# Altium PCB Amplifier_2.PcbDoc
Units mil, origin at the board's own origin, x right, y up, seen from the top; angles counter-clockwise.
Board outline 6000 x 4000 mil, 2 copper layers (Top Layer, Bottom Layer); 16 components, 12 nets, 38 pads, 0 vias.
Unrouted connection lines stored in the file: 25.
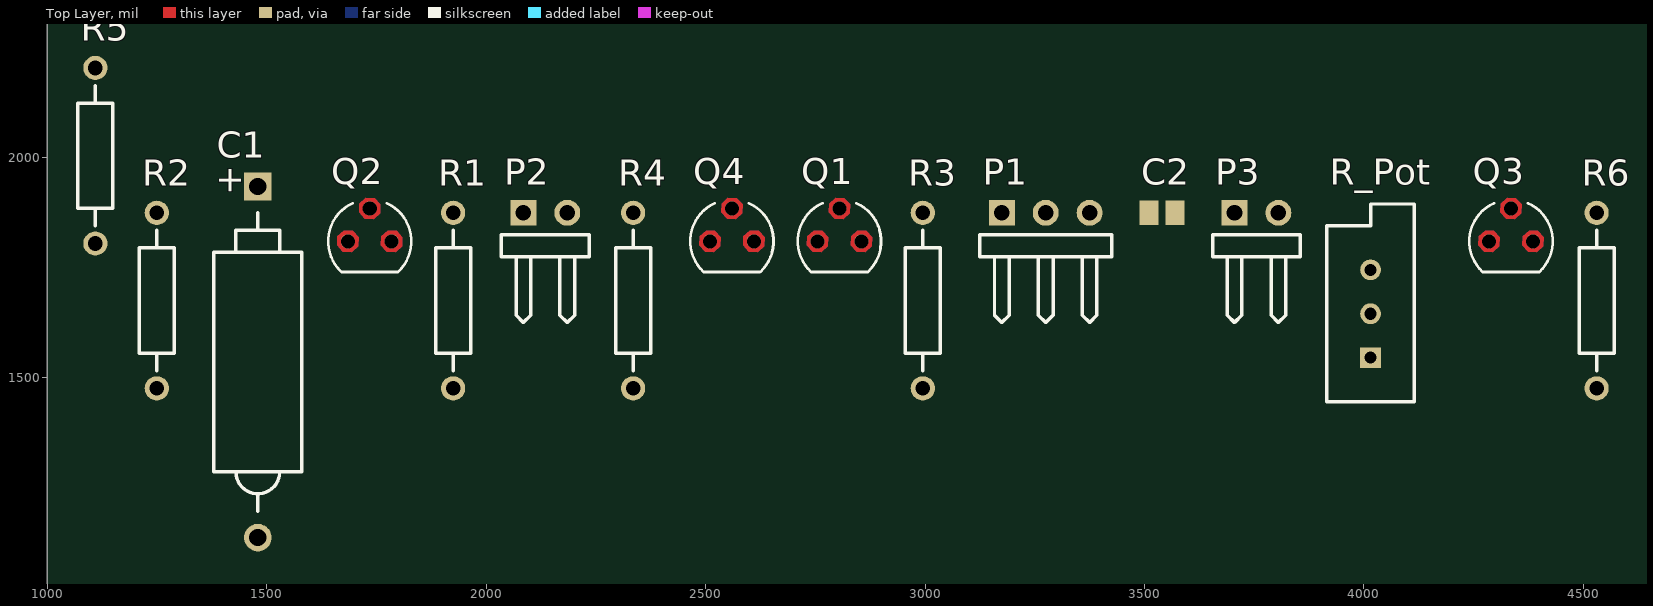
[diagram p0: Top Layer view]
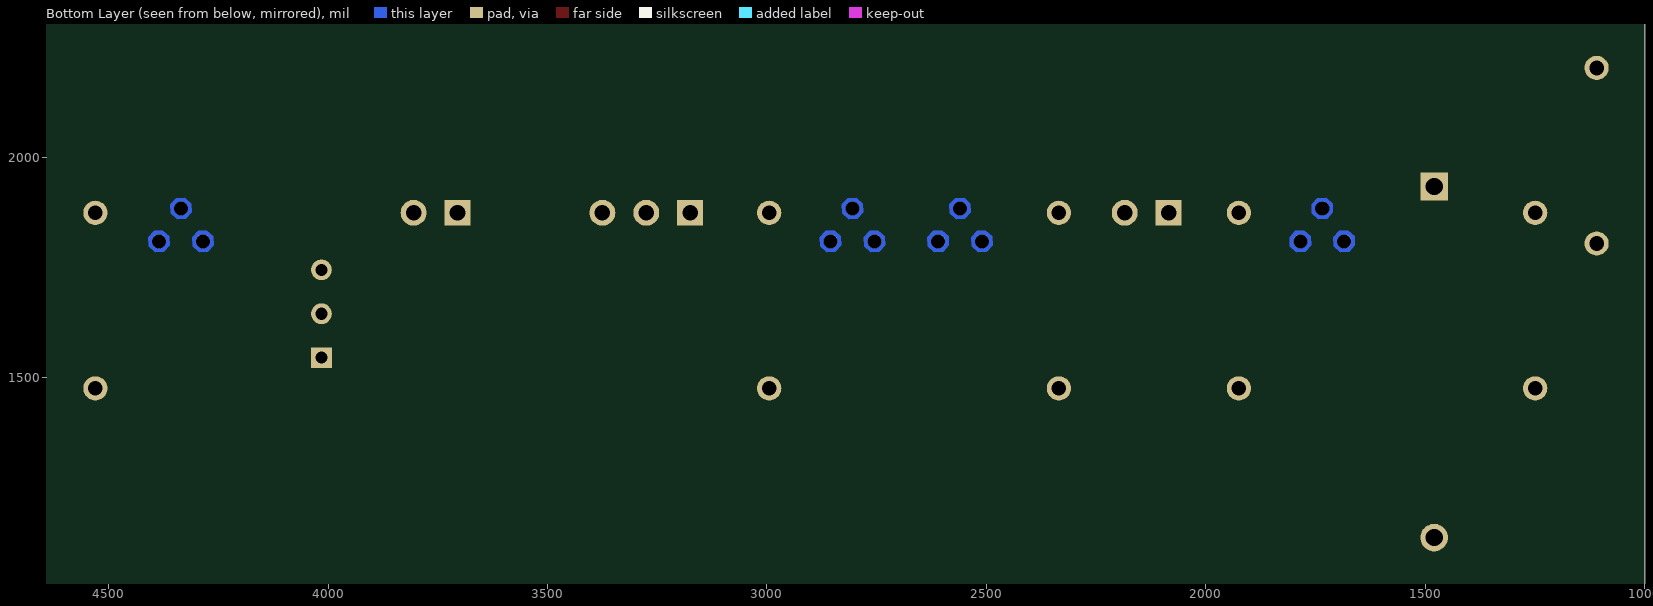
[diagram p1: Bottom Layer view, seen from below]

## Layer stack, top to bottom
Top Solder: solder mask 0.4, Solder Resist, Dk 3.5
Top Layer: signal copper 1.4
Dielectric 1: dielectric 12.6, FR-4, Dk 4.8
Bottom Layer: signal copper 1.4
Bottom Solder: solder mask 0.4, Solder Resist, Dk 3.5

## Board outline
1000,1000 7000,1000 7000,5000 1000,5000

## Design rules (kind name [scope] priority, off if disabled: settings)
Clearance [All] p1: gap=10 ignorepadtopadclearanceinfootprint=FALSE except(0: Arc-Hole Track-Hole SMDPad-Hole THPad-Hole Via-Hole Fill-Hole Poly-Hole Region-Hole Text-Hole)
PolygonConnect [All] p1: connectstyle=Relief reliefconductorwidth=10 reliefentries=4 polygonreliefangle="90 Angle" airgapwidth=10
RoomDefinition Amp_2 [InComponentClass('Amp_2')] p1: confinementstyle=ConfineIn formatcopy=TRUE lockcomponents=FALSE outline 1030,1025 4615,1025 4615,2860 1030,2860
RoutingVias [All] p1: holewidth=28 width=50 viastyle="Through Hole" minholewidth=28 minwidth=50 maxholewidth=28 maxwidth=50
SolderMaskExpansion [All] p1: expansion=4
Width [All] p1: maxlimit=10 minlimit=10 preferedwidth=10
30 further rules are at their usual default settings.

## Components (designator, comment, footprint, x,y, rotation, side; value= is the part's Value field where it differs from the comment)
C1 "Cap Pol2" POLAR0.8 1480,1535 r90 top value=47uF
C2 "Cap Pol3" C0805 3540,1875 r0 top value=33uF
P1 "Header 3H" HDR1X3H 3175,1875 r0 top
P2 "Header 2H" HDR1X2H 2085,1875 r0 top
P3 "Header 2H" HDR1X2H 3705,1875 r0 top
Q1 "BC639" *SOT54D_BC639(Primary) 2805,1810 r0 top
Q2 "BC640" *SOT54D_BC640(Primary) 1735,1810 r0 top
Q3 "BC639" *SOT54D_BC639(Primary) 4335,1810 r0 top
Q4 "BC640" *SOT54D_BC640(Primary) 2560,1810 r0 top
R1 "Res2" AXIAL-0.4 1925,1675 r90 top value=22k
R2 "Res2" AXIAL-0.4 1250,1675 r90 top value=15k
R3 "Res2" AXIAL-0.4 2995,1675 r90 top value=2.2k
R4 "Res2" AXIAL-0.4 2335,1675 r90 top value=4.7k
R5 "Res2" AXIAL-0.4 1110,2005 r90 top value=4.7k
R6 "Res2" AXIAL-0.4 4530,1675 r90 top value=10k
R_Pot "RPot" VR5 4015,1645 r90 top value=10k

## Footprints (in the part's own frame and the unit in brackets; to place one, negate y for a bottom-side part, rotate by r counter-clockwise, add the part's x,y. Pads: shape width x height; smd on the part's side, far side on the other; paste and mask are expansions set on the pad)
*SOT54D_BC639(Primary) [mil]
  round 32 hole 32: B(50,0) C(0,75) E(-50,0)
  Top Layer region: -25.57,8.89 -39.01,23.56 -58.89,24.43 -73.56,10.99 -74.43,-8.89 -60.99,-23.56 -41.11,-24.43 -26.44,-10.99
  Top Layer region: 24.43,83.89 10.99,98.56 -8.89,99.43 -23.56,85.99 -24.43,66.11 -10.99,51.44 8.89,50.57 23.56,64.01
  Top Layer region: 74.43,8.89 60.99,23.56 41.11,24.43 26.44,10.99 25.57,-8.89 39.01,-23.56 58.89,-24.43 73.56,-10.99
  Bottom Layer region: -25.57,8.89 -39.01,23.56 -58.89,24.43 -73.56,10.99 -74.43,-8.89 -60.99,-23.56 -41.11,-24.43 -26.44,-10.99
  Bottom Layer region: 24.43,83.89 10.99,98.56 -8.89,99.43 -23.56,85.99 -24.43,66.11 -10.99,51.44 8.89,50.57 23.56,64.01
  Bottom Layer region: 74.43,8.89 60.99,23.56 41.11,24.43 26.44,10.99 25.57,-8.89 39.01,-23.56 58.89,-24.43 73.56,-10.99
  Multi-Layer region: -25.57,8.89 -39.01,23.56 -58.89,24.43 -73.56,10.99 -74.43,-8.89 -60.99,-23.56 -41.11,-24.43 -26.44,-10.99
  Multi-Layer region: 24.43,83.89 10.99,98.56 -8.89,99.43 -23.56,85.99 -24.43,66.11 -10.99,51.44 8.89,50.57 23.56,64.01
  Multi-Layer region: 74.43,8.89 60.99,23.56 41.11,24.43 26.44,10.99 25.57,-8.89 39.01,-23.56 58.89,-24.43 73.56,-10.99
  silkscreen extent -95,-70 95,87
*SOT54D_BC640(Primary) [mil]
  round 32 hole 32: B(50,0) C(0,75) E(-50,0)
  Top Layer region: -25.57,8.89 -39.01,23.56 -58.89,24.43 -73.56,10.99 -74.43,-8.89 -60.99,-23.56 -41.11,-24.43 -26.44,-10.99
  Top Layer region: 24.43,83.89 10.99,98.56 -8.89,99.43 -23.56,85.99 -24.43,66.11 -10.99,51.44 8.89,50.57 23.56,64.01
  Top Layer region: 74.43,8.89 60.99,23.56 41.11,24.43 26.44,10.99 25.57,-8.89 39.01,-23.56 58.89,-24.43 73.56,-10.99
  Bottom Layer region: -25.57,8.89 -39.01,23.56 -58.89,24.43 -73.56,10.99 -74.43,-8.89 -60.99,-23.56 -41.11,-24.43 -26.44,-10.99
  Bottom Layer region: 24.43,83.89 10.99,98.56 -8.89,99.43 -23.56,85.99 -24.43,66.11 -10.99,51.44 8.89,50.57 23.56,64.01
  Bottom Layer region: 74.43,8.89 60.99,23.56 41.11,24.43 26.44,10.99 25.57,-8.89 39.01,-23.56 58.89,-24.43 73.56,-10.99
  Multi-Layer region: -25.57,8.89 -39.01,23.56 -58.89,24.43 -73.56,10.99 -74.43,-8.89 -60.99,-23.56 -41.11,-24.43 -26.44,-10.99
  Multi-Layer region: 24.43,83.89 10.99,98.56 -8.89,99.43 -23.56,85.99 -24.43,66.11 -10.99,51.44 8.89,50.57 23.56,64.01
  Multi-Layer region: 74.43,8.89 60.99,23.56 41.11,24.43 26.44,10.99 25.57,-8.89 39.01,-23.56 58.89,-24.43 73.56,-10.99
  silkscreen extent -95,-70 95,87
AXIAL-0.4 [mm] "Axial Device, Thru-Hole; 2 Leads; 0.4 in Pin Spacing"
  round 1.4 hole 0.85: 1(-5.08,0) 2(5.08,0)
  silkscreen extent -4.06,-1.02 4.06,1.02
C0805 [mm] "Chip Capacitor, Body 2.0x1.3mm, IPC High Density"
  rect 1.1x1.4 smd: 1(-0.75,0) 2(0.75,0)
  body extent -1.1,-0.72 1.1,0.72, height 1.4
HDR1X2H [mm] "Connector; Header; 2 Position; Right Angle"
  rect 1.5x1.5 hole 0.9: 1(0,0)
  round 1.5 hole 0.9: 2(2.54,0)
  silkscreen extent -1.27,-6.35 3.81,-1.27
HDR1X3H [mm] "Connector; Header; 3 Position; Right Angle"
  rect 1.5x1.5 hole 0.9: 1(0,0)
  round 1.5 hole 0.9: 2(2.54,0) 3(5.08,0)
  silkscreen extent -1.27,-6.35 6.35,-1.27
POLAR0.8 [mm] "Polarized Capacitor; 2 Leads"
  rect 1.6x1.6 hole 1: 1(10.16,0)
  round 1.6 hole 1: 2(-10.16,0)
  silkscreen extent -8.64,-2.54 8.64,2.54
VR5 [mm] "Thru-Hole; 3 Leads"
  rect 1.2x1.2 hole 0.7: 1(-2.54,0)
  round 1.2 hole 0.7: 2(0,0) 3(2.54,0)
  silkscreen extent -5.08,-2.54 6.35,2.54

## Part data
C1: "Polarized Capacitor (Axial)", LatestRevisionDate=17-Jul-2002, LatestRevisionNote="Re-released for DXP Platform.", PackageDescription="Polarized Capacitor; 2 Leads", PackageReference=POLAR0.8, Published=8-Jun-2000, Publisher="Altium Limited"
C2: "Polarized Capacitor (Surface Mount)", LatestRevisionDate=29-May-2009, LatestRevisionNote="IPC-7351 Footprint Added.", PackageDescription="Chip Capacitor", PackageReference=C0805, Published=8-Jun-2000, Publisher="Altium Limited"
P1: "Header, 3-Pin, Right Angle", LatestRevisionDate=17-Jul-2002, LatestRevisionNote="Re-released for DXP Platform.", Publisher="Altium Limited"
P2 P3: "Header, 2-Pin, Right Angle", LatestRevisionDate=17-Jul-2002, LatestRevisionNote="Re-released for DXP Platform.", Publisher="Altium Limited"
Q1 Q3: "Bipolar _BJT_ Transistor NPN 80V 1A 200MHz 625mW Through Hole TO-92-3", Package="TO-92 Continental Device", Availability=Unavailable, MF="ON Semiconductor", MP=BC639, Price=None, SnapEDA_Link=https://www.snapeda.com/parts/BC639/ON%20Semiconductor/view-part/761111/?ref=snap
Q2 Q4: "Bipolar _BJT_ Transistor PNP 80V 500mA 150MHz 625mW Through Hole TO-92-3", Package="TO-92 Continental Device", Availability=Unavailable, MF="ON Semiconductor", MP=BC640, Price=None, SnapEDA_Link=https://www.snapeda.com/parts/BC640/ON%20Semiconductor/view-part/2782146/?ref=snap
R1 R2 R3 R4 R5 R6: "Resistor", LatestRevisionDate=17-Jul-2002, LatestRevisionNote="Re-released for DXP Platform.", PackageDescription="Axial Device, Thru-Hole; 2 Leads; 0.4 in Pin Spacing", PackageReference=AXIAL-0.4, Published=8-Jun-2000, Publisher="Altium Limited"
R_Pot: "Potentiometer", LatestRevisionDate=17-Jul-2002, LatestRevisionNote="Re-released for DXP Platform.", PackageDescription="Variable Resistor, Thru-Hole; 3 Leads", PackageReference=VR5, Published=8-Jun-2000, Publisher="Altium Limited", Set Position=0.5, Sim Note="Enter the Resistance value and the set point into parameter fields."

## Nets (pads, with @x,y where several pads share a name; then routed paths per layer and width w, separated by ;. In a path a pad name is that pad's centre, name@x,y a point inside that pad or via, vN(x,y) a via of type N, cw(c..) or ccw(c..) an arc to the next point about the centre after c; other vN are vias at no path point)
NetC1_1: C1.1 P2.1
NetC1_2: C1.2 Q2.B R1.1 R2.2
NetC2_1: C2.1 Q3.E Q4.E
NetC2_2: C2.2 P3.2
NetP1_1: P1.1 Q4.C R2.1 R5.1
NetP1_2: P1.2 P2.2 P3.1
NetP1_3: P1.3 Q3.C R1.2 R6.2
NetQ1_B: Q1.B R3.1 R4.2
NetQ1_C: Q1.C Q3.B R6.1 R_Pot.3
NetQ1_E: Q1.E Q2.E Q4.B R4.1
NetQ2_C: Q2.C R5.2
NetR3_2: R3.2 R_Pot.2
pads on no net: R_Pot.1

## Text inside footprints (layer, text, board x,y; h text height)
C1: Top Overlay "+" at 1442.6,1915 h59.06 r90